# EAGLE board freiBot (EAGLE 6.5.0)
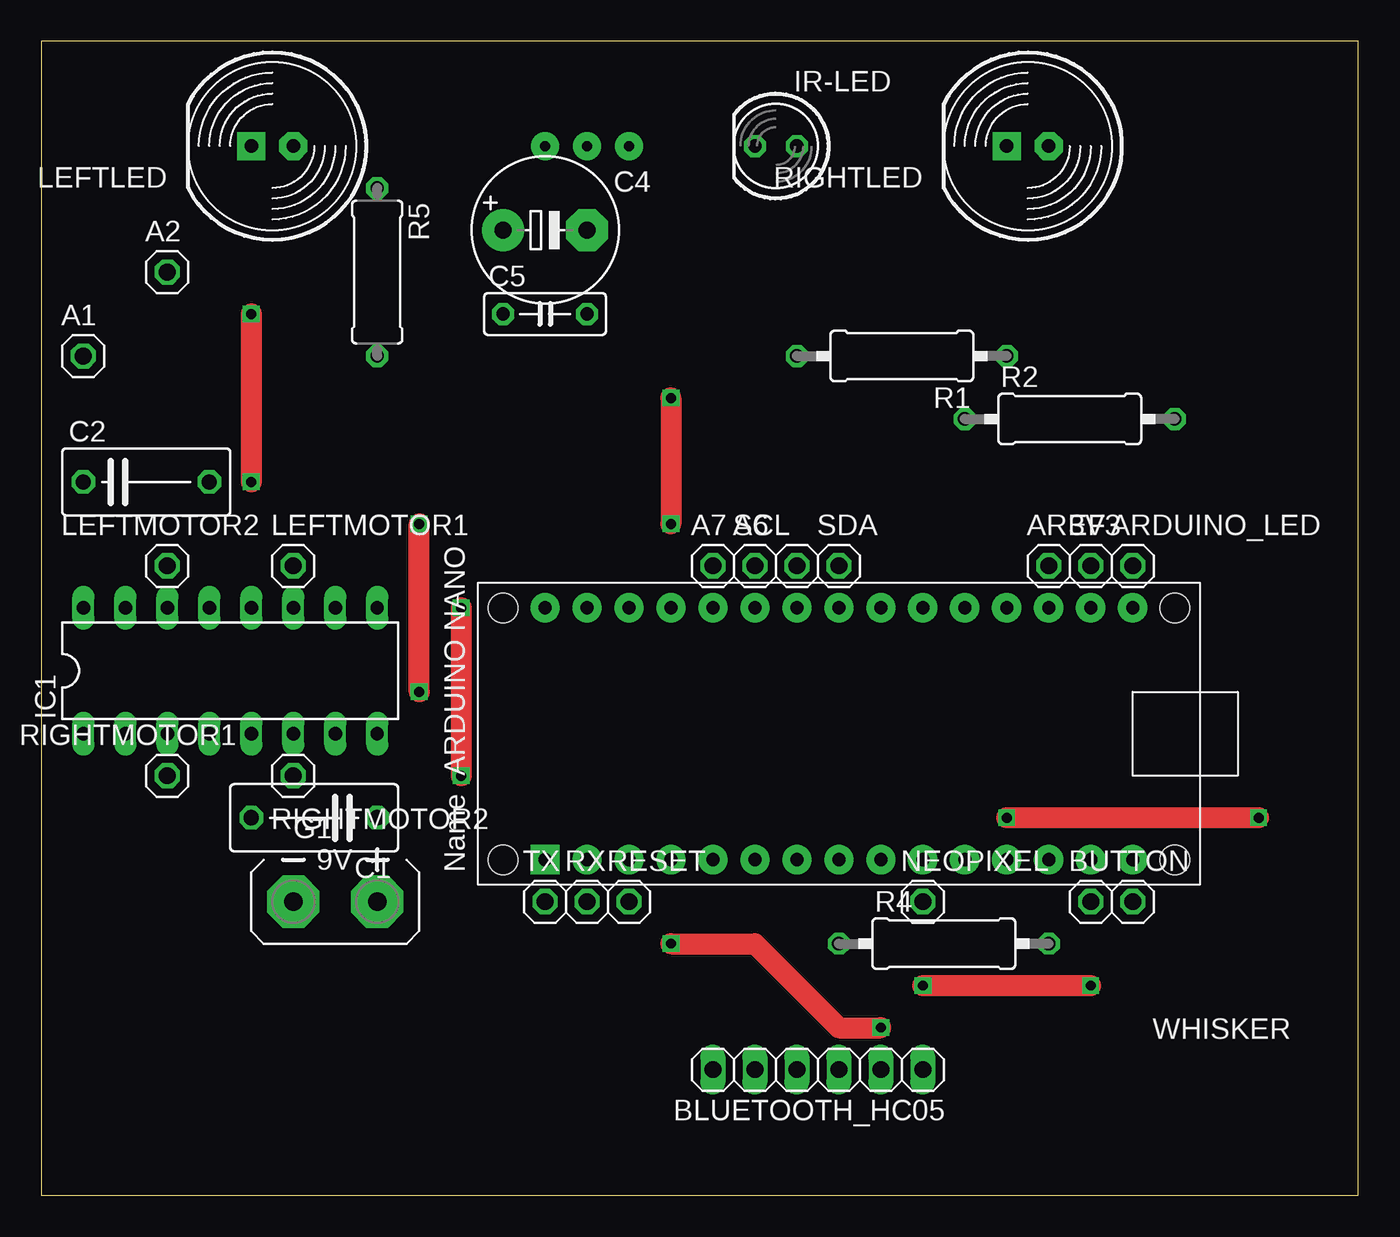
[diagram p0: board, top side]
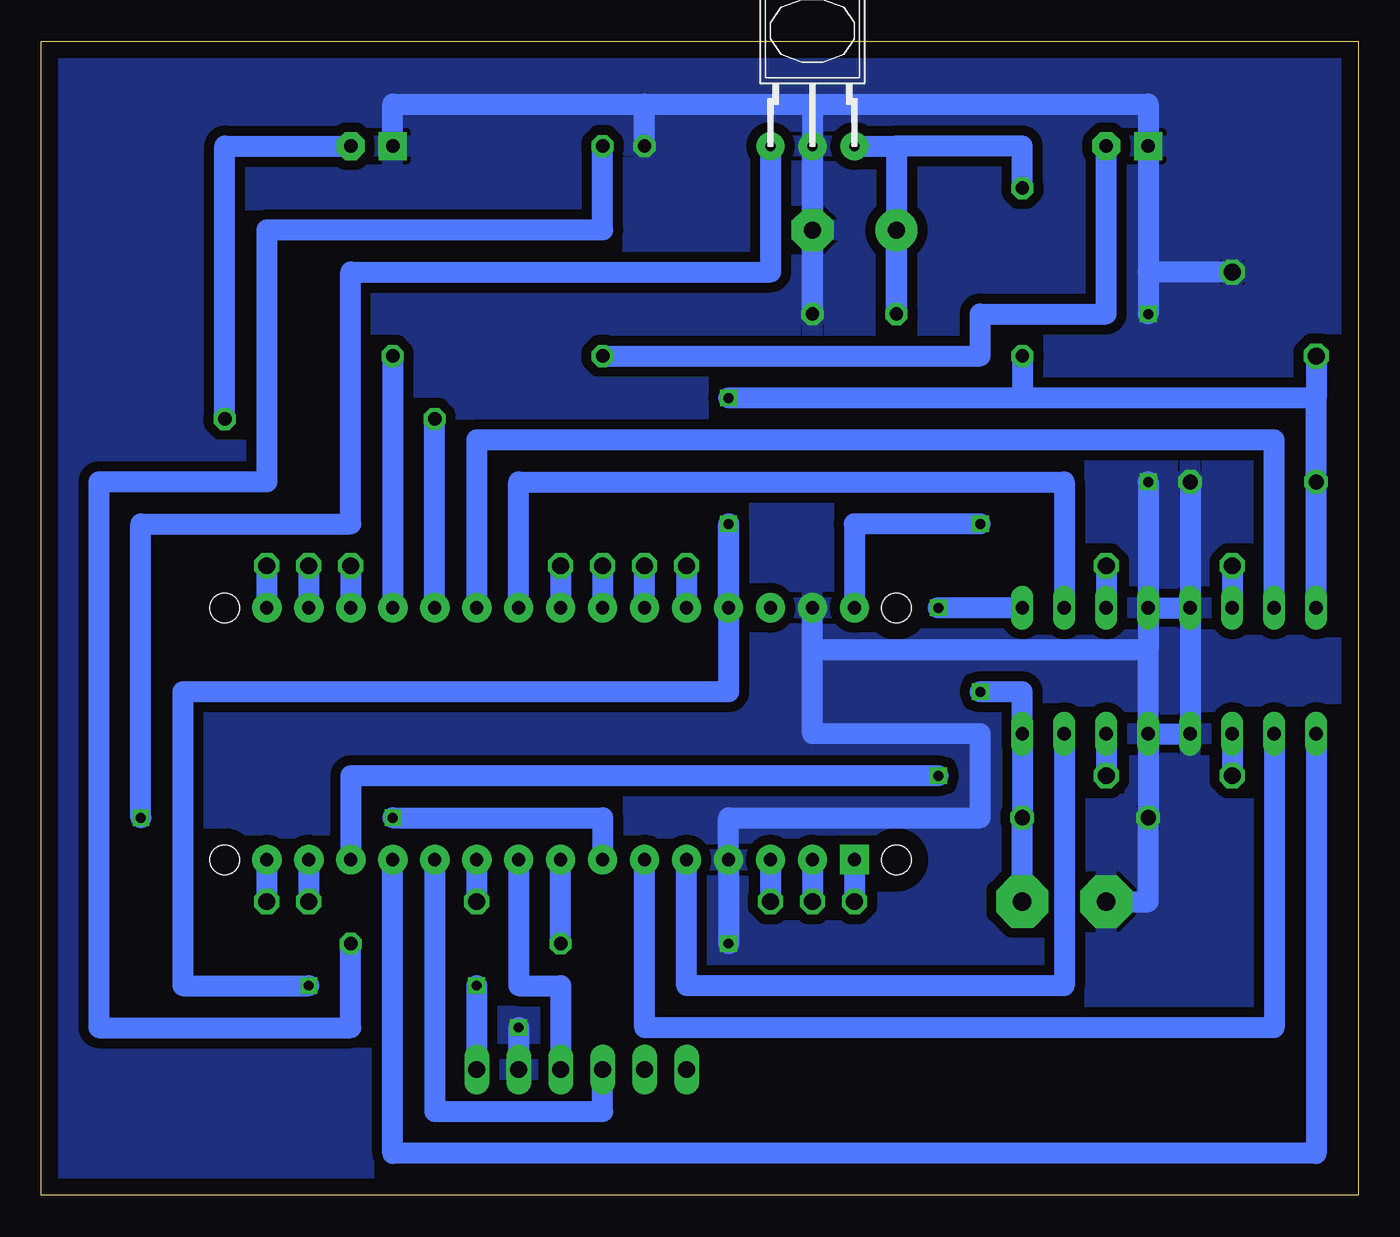
[diagram p1: board, bottom side, seen from below]

Size 79.68 x 69.84 mm. Coordinates in mm from the lower left corner, seen from the top.
Outline: 0,0 79.68,0 79.68,69.84 0,69.84 0,0
Copper layers (1*16): Top 0.035mm / dielectric 1.5mm / Bottom 0.035mm
Design rules "default *": minimum track width 50mil, minimum drill 24mil, track to track 8mil, track to pad 8mil, pad to pad 8mil, via to via 8mil, smd to smd 8mil, copper to edge 40mil, drill to drill 8mil, minimum pad ring 10mil, minimum via ring 8mil, stop-mask expansion 4mil, vias tented up to drill 0mil, thermal gap 10mil

## Footprints (pad centres in the part's own frame; a part is rotated, then mirrored left to right if it is on the bottom)
1X01 = drill 1.016 octagon: 1 0,0
1X06 = drill 1.016 long: 1 -6.35,0; 2 -3.81,0; 3 -1.27,0; 4 1.27,0; 5 3.81,0; 6 6.35,0
C075-042X103 = drill 0.914 octagon: 1 -3.81,0; 2 3.81,0
E5-8,5 = drill 1.016 pad 2.54: + -2.54,0 | drill 1.016 pad 2.54 octagon: - 2.54,0
C050-025X075 = drill 0.813 octagon: 1 -2.54,0; 2 2.54,0
AB9V = drill 1.118 pad 3.15 octagon: + 0,2.54; - 0,-2.54
DIL16 = drill 0.813 long: 1 -8.89,-3.81; 2 -6.35,-3.81; 3 -3.81,-3.81; 4 -1.27,-3.81; 5 1.27,-3.81; 6 3.81,-3.81; 7 6.35,-3.81; 8 8.89,-3.81; 9 8.89,3.81; 10 6.35,3.81; 11 3.81,3.81; 12 1.27,3.81; 13 -1.27,3.81; 14 -3.81,3.81; 15 -6.35,3.81; 16 -8.89,3.81
SFH511* = drill 0.61 pad 1.676: 1 -2.54,0; 2 0,0; 3 2.54,0
LED5MM = drill 0.813 octagon: A -1.27,0; K 1.27,0
LED10MM = drill 0.813 pad 1.676 octagon: A -1.27,0 | drill 0.813 pad 1.676 square: K 1.27,0
0309/12 = drill 0.813 octagon: 1 -6.35,0; 2 6.35,0
0309/10 = drill 0.813 octagon: 1 -5.08,0; 2 5.08,0
PDIP-32 = drill 0.8 pad 1.778: 3V3 15.24,-35.56; +5V 15.24,-10.16; A0 15.24,-30.48; A1 15.24,-27.94; A2 15.24,-25.4; A3 15.24,-22.86; A4 15.24,-20.32; A5 15.24,-17.78; A6 15.24,-15.24; A7 15.24,-12.7; AREF 15.24,-33.02; D0/RX 0,-5.08; D2 0,-12.7; D3 0,-15.24; D4 0,-17.78; D5 0,-20.32; D6 0,-22.86; D7 0,-25.4; D8 0,-27.94; D9 0,-30.48; D10 0,-33.02; D11 0,-35.56; D12 0,-38.1; D13 15.24,-38.1; GND 0,-10.16; GND1 15.24,-5.08; RESET 0,-7.62; RESET1 15.24,-7.62; VIN 15.24,-2.54 | drill 0.8 pad 1.778 square: D1/TX 0,-2.54 | hole 1.778: 0,0; 0,-40.64; 15.24,-40.64; 15.24,0

## Placement (x,y rotation side)
3V3  [1X01]  63.5,38.1 0 top
A1  V5V  [1X01]  2.54,50.8 0 top
A2  VGND  [1X01]  7.62,55.88 0 top
A6  [1X01]  43.18,38.1 0 top
A7  [1X01]  40.64,38.1 0 top
ARDUINO_LED  [1X01]  66.04,38.1 0 top
AREF  [1X01]  60.96,38.1 0 top
BLUETOOTH_HC05  [1X06]  46.99,7.62 180 top
BUTTON  [1X01]  63.5,17.78 0 top
C1  220n  [C075-042X103]  16.51,22.86 180 top
C2  220n  [C075-042X103]  6.35,43.18 0 top
C4  [E5-8,5]  30.48,58.42 0 top
C5  100n  [C050-025X075]  30.48,53.34 0 top
G1  AB9V  [AB9V]  17.78,17.78 270 top
IC1  L293D  [DIL16]  11.43,31.75 0 top
IR1  [SFH511*]  33.02,63.5 0 bottom
IR-LED  [LED5MM]  44.45,63.5 180 top
LEFTLED  [LED10MM]  13.97,63.5 180 top
LEFTMOTOR1  [1X01]  15.24,38.1 0 top
LEFTMOTOR2  [1X01]  7.62,38.1 0 top
NEOPIXEL  [1X01]  53.34,17.78 0 top
R1  270  [0309/12]  52.07,50.8 180 top
R2  270  [0309/12]  62.23,46.99 0 top
R4  270  [0309/12]  54.61,15.24 0 top
R5  100  [0309/10]  20.32,55.88 270 top
RESET  [1X01]  35.56,17.78 0 top
RIGHTLED  [LED10MM]  59.69,63.5 180 top
RIGHTMOTOR1  [1X01]  7.62,25.4 0 top
RIGHTMOTOR2  [1X01]  15.24,25.4 0 top
RX  [1X01]  33.02,17.78 0 top
SCL  [1X01]  45.72,38.1 0 top
SDA  [1X01]  48.26,38.1 0 top
TX  [1X01]  30.48,17.78 0 top
U$1  ARDUINONANO  [PDIP-32]  27.94,20.32 90 top
WHISKER  [1X01]  66.04,17.78 0 top

## Library data of the parts
3V3 A1 A2 A6 A7 ARDUINO_LED AREF BLUETOOTH_HC05 BUTTON LEFTMOTOR1 LEFTMOTOR2 NEOPIXEL RESET RIGHTMOTOR1 RIGHTMOTOR2 RX SCL SDA TX WHISKER = pinhead
C1 C2 C4 C5 R1 R2 R4 R5 = rcl
G1 = battery
IC1 = st-microelectronics; MPN: L293D; OC_FARNELL: 9589619; OC_NEWARK: 56P8249
IR1 IR-LED = 0-svo
LEFTLED RIGHTLED = led
U$1 = jet-lib

## Nets
+5V: A1.1 BLUETOOTH_HC05.1 C2.1 IC1.16 R5.2 U$1.+5V
BLUE_KEY: BLUETOOTH_HC05.5
BLUE_LED: BLUETOOTH_HC05.6
BLUE_RXD_ARDUINO_TXD: BLUETOOTH_HC05.4 U$1.D8
BLUE_TXD_ARDUINO_RXD: BLUETOOTH_HC05.3 U$1.D6
GND: A2.1 BLUETOOTH_HC05.2 C1.2 C2.2 C4.- C5.2 G1.- IC1.4 IC1.5 IC1.12 IC1.13 IR1.2 IR-LED.K LEFTLED.K RIGHTLED.K U$1.GND U$1.GND1
N$1: IC1.7 U$1.D2
N$2: IC1.2 U$1.D3
N$3: IC1.1 U$1.D9
N$4: IC1.3 RIGHTMOTOR1.1
N$5: IC1.9 U$1.D10
N$6: IC1.10 U$1.A3
N$7: IC1.15 U$1.A2
N$8: IC1.6 RIGHTMOTOR2.1
N$9: IC1.11 LEFTMOTOR1.1
N$10: IC1.14 LEFTMOTOR2.1
N$11: C1.1 G1.+ IC1.8 U$1.VIN
N$12: IR-LED.A R4.2
N$13: R1.1 U$1.A0
N$14: R2.1 U$1.A1
N$15: R2.2 RIGHTLED.A
N$16: LEFTLED.A R1.2
N$17: SDA.1 U$1.A4
N$18: SCL.1 U$1.A5
N$19: ARDUINO_LED.1 U$1.D13
N$20: U$1.D12 WHISKER.1
N$21: BUTTON.1 U$1.D11
N$22: NEOPIXEL.1 U$1.D7
N$23: IR1.1 U$1.D4
N$24: R4.1 U$1.D5
N$25: A6.1 U$1.A6
N$26: 3V3.1 U$1.3V3
N$27: AREF.1 U$1.AREF
N$28: A7.1 U$1.A7
N$29: RESET.1 U$1.RESET
N$30: TX.1 U$1.D1/TX
N$31: RX.1 U$1.D0/RX
VCC: C4.+ C5.1 IR1.3 R5.1

## Tracks (layer width: path | path; a pad name or v marks a point on that pad's centre or on a via)
+5V  (via drill 0.6)
  Top 1.27: v38.1,48.26 v38.1,40.64 | v63.5,12.7 v53.34,12.7
  Bottom 1.27: C2.1 IC1.16 2.54,48.26 | 2.54,48.26 20.32,48.26 | 20.32,48.26 v38.1,48.26 | A1.1 2.54,48.26 | R5.2 20.32,48.26 | U$1.+5V v38.1,40.64 38.1,30.48 71.12,30.48 71.12,12.7 v63.5,12.7 | v53.34,12.7 BLUETOOTH_HC05.1
BLUE_RXD_ARDUINO_TXD
  Bottom 1.27: U$1.D8 55.88,5.08 45.72,5.08 BLUETOOTH_HC05.4
BLUE_TXD_ARDUINO_RXD
  Bottom 1.27: U$1.D6 50.8,12.7 48.26,12.7 BLUETOOTH_HC05.3
GND  (via drill 0.6)
  Top 1.27: v12.7,53.34 v12.7,43.18 | v38.1,15.24 43.18,15.24 48.26,10.16 v50.8,10.16
  Bottom 1.27: IC1.5 C1.2 12.7,17.78 G1.- | IC1.5 12.7,33.02 | IC1.5 IC1.4 IC1.13 | C2.2 IC1.13 | IC1.12 IC1.13 | IC1.12 12.7,33.02 | 12.7,33.02 33.02,33.02 | 33.02,33.02 U$1.GND1 | 33.02,33.02 33.02,27.94 22.86,27.94 22.86,22.86 38.1,22.86 U$1.GND v38.1,15.24 | 12.7,55.88 LEFTLED.K 12.7,66.04 33.02,66.04 | 12.7,55.88 v12.7,53.34 | v12.7,43.18 IC1.12 | 33.02,66.04 C5.2 | C5.2 IR1.2 | RIGHTLED.K 58.42,66.04 43.18,66.04 | 43.18,66.04 33.02,66.04 | IR-LED.K 43.18,66.04 | A2.1 12.7,55.88 | C4.- C5.2 | v50.8,10.16 BLUETOOTH_HC05.2
  pour Bottom (isolate 0.6): 0,73.66 83.82,73.66 83.82,-2.54 -2.54,-2.54 -2.54,73.66
N$1
  Bottom 1.27: IC1.7 17.78,12.7 40.64,12.7 U$1.D2
N$2
  Bottom 1.27: IC1.2 5.08,10.16 43.18,10.16 U$1.D3
N$3
  Bottom 1.27: IC1.1 2.54,2.54 58.42,2.54 U$1.D9
N$4
  Bottom 1.27: IC1.3 RIGHTMOTOR1.1
N$5  (via drill 0.6)
  Top 1.27: v25.4,35.56 v25.4,25.4
  Bottom 1.27: IC1.9 v25.4,35.56 | v25.4,25.4 60.96,25.4 U$1.D10
N$6
  Bottom 1.27: U$1.A3 50.8,43.18 17.78,43.18 IC1.10
N$7
  Bottom 1.27: IC1.15 5.08,45.72 53.34,45.72 U$1.A2
N$8
  Bottom 1.27: IC1.6 RIGHTMOTOR2.1
N$9
  Bottom 1.27: LEFTMOTOR1.1 IC1.11
N$10
  Bottom 1.27: LEFTMOTOR2.1 IC1.14
N$11  (via drill 0.6)
  Top 1.27: v22.86,30.48 v22.86,40.64
  Bottom 1.27: v22.86,40.64 30.48,40.64 U$1.VIN | v22.86,30.48 20.32,30.48 IC1.8 C1.1 G1.+
N$12
  Bottom 1.27: IR-LED.A 45.72,58.42 66.04,58.42 66.04,43.18 76.2,43.18 76.2,10.16 60.96,10.16 R4.2
N$13
  Bottom 1.27: R1.1 U$1.A0
N$14
  Bottom 1.27: U$1.A1 R2.1
N$15
  Bottom 1.27: R2.2 68.58,63.5 RIGHTLED.A
N$16
  Bottom 1.27: R1.2 22.86,50.8 22.86,53.34 15.24,53.34 LEFTLED.A
N$17
  Bottom 1.27: SDA.1 U$1.A4
N$18
  Bottom 1.27: SCL.1 U$1.A5
N$19
  Bottom 1.27: ARDUINO_LED.1 U$1.D13
N$20
  Bottom 1.27: U$1.D12 WHISKER.1
N$21
  Bottom 1.27: U$1.D11 BUTTON.1
N$22
  Bottom 1.27: U$1.D7 NEOPIXEL.1
N$23  (via drill 0.6)
  Top 1.27: v73.66,22.86 v58.42,22.86
  Bottom 1.27: IR1.1 35.56,55.88 60.96,55.88 60.96,40.64 73.66,40.64 v73.66,22.86 | v58.42,22.86 45.72,22.86 U$1.D4
N$24
  Bottom 1.27: R4.1 U$1.D5
N$25
  Bottom 1.27: U$1.A6 A6.1
N$26
  Bottom 1.27: 3V3.1 U$1.3V3
N$27
  Bottom 1.27: AREF.1 U$1.AREF
N$28
  Bottom 1.27: A7.1 U$1.A7
N$29
  Bottom 1.27: U$1.RESET RESET.1
N$30
  Bottom 1.27: U$1.D1/TX TX.1
N$31
  Bottom 1.27: U$1.D0/RX RX.1
VCC
  Bottom 1.27: IR1.3 27.94,63.5 | 27.94,63.5 C5.1 C4.+ | R5.1 20.32,63.5 27.94,63.5